# Altium PCB Dongle.PcbDoc
Units mil, origin at the board's own origin, x right, y up, seen from the top; angles counter-clockwise.
Board outline 3760.03 x 1770.03 mil, 2 copper layers (Top Layer, Bottom Layer); 34 components, 35 nets, 167 pads, 0 vias.
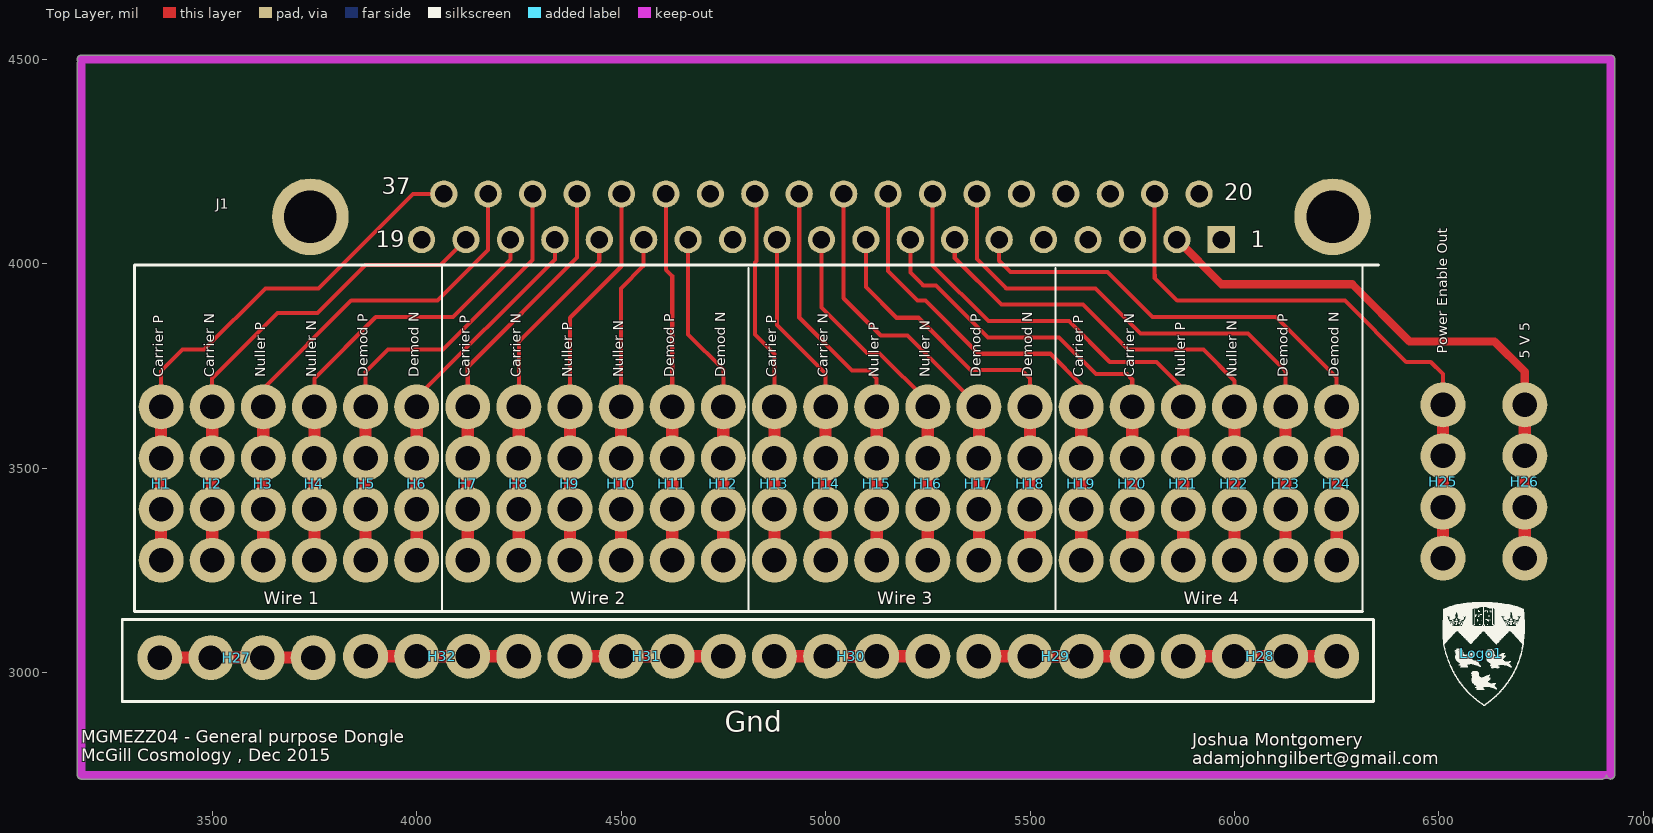
[diagram p0: Top Layer view]
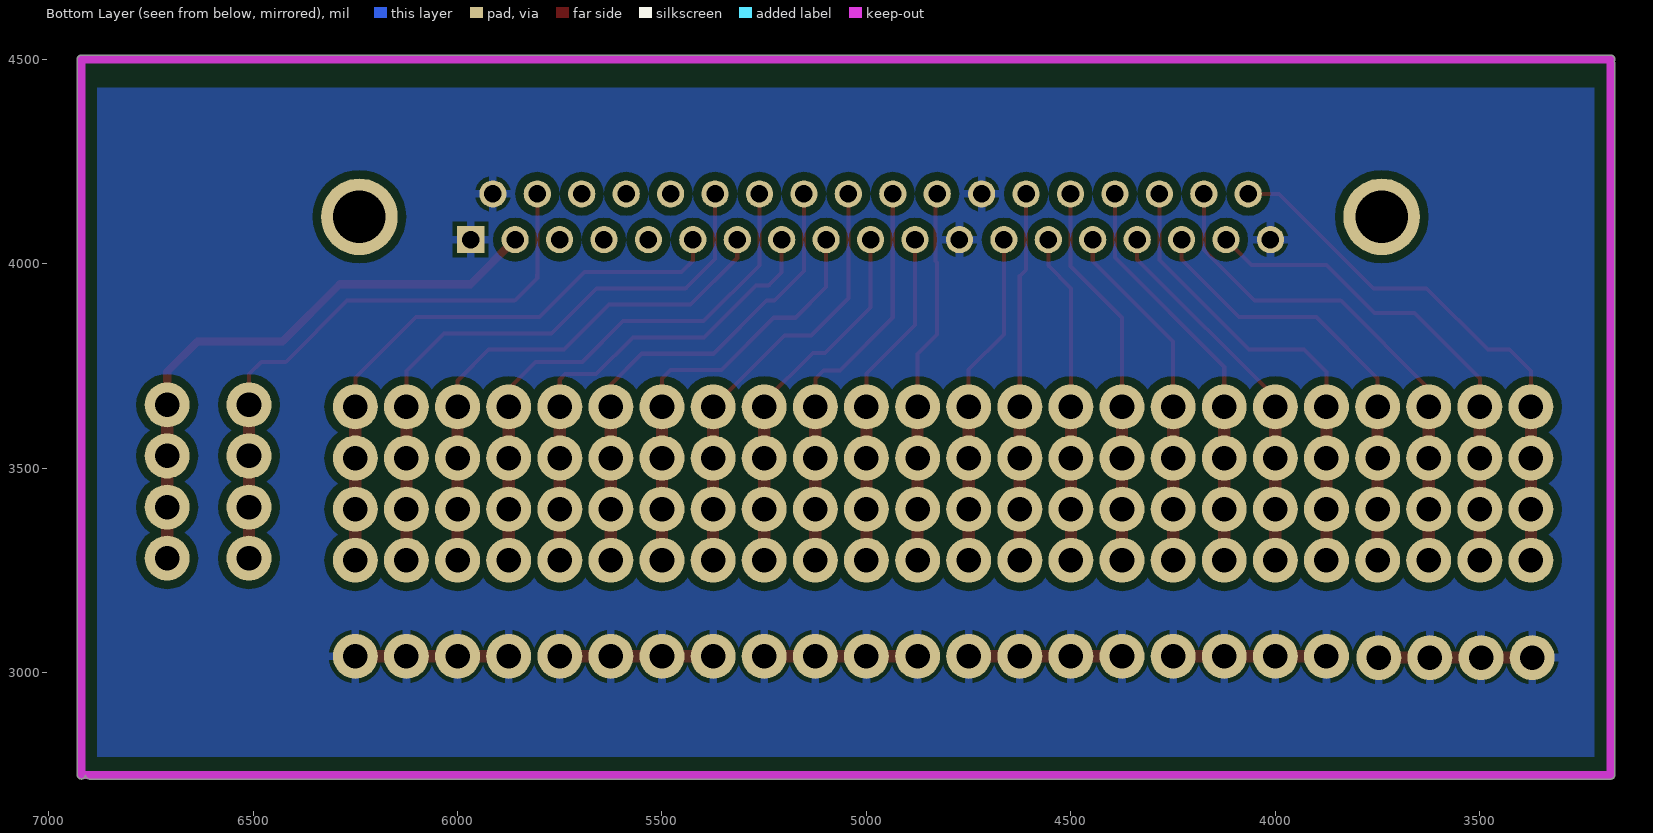
[diagram p1: Bottom Layer view, seen from below]

## Layer stack, top to bottom
Top Solder: solder mask 0.4, Solder Resist, Dk 3.5
Top Layer: signal copper 1.4
Dielectric 1: dielectric 12.6, FR-4, Dk 4.8
Bottom Layer: signal copper 1.4
Bottom Solder: solder mask 0.4, Solder Resist, Dk 3.5

## Board outline
3169.99,2750 ccw(c3180,2750) 3180,2739.99 6900,2739.99 ccw(c6900,2750) 6910,2749.45 ccw(c6920,2750) 6930.02,2750 6930.02,4500 ccw(c6920,4500) 6920,4510.02 3180,4510.02 ccw(c3180,4500) 3171.32,4495 ccw(c3180,4490) 3169.99,4490

## Design rules (kind name [scope] priority, off if disabled: settings)
Clearance Clearance_Gnd [InNet('GND')] p1: gap=20
Clearance [All] p2: gap=10
DiffPairsRouting [All] p1: maxlimit=10 minlimit=10 mostfreqgap=10 toplayer_minwidth=15 toplayer_maxwidth=15 toplayer_prefwidth=15 bottomlayer_minwidth=15 bottomlayer_maxwidth=15 bottomlayer_prefwidth=15 maxuncoupledlength=500
HoleSize [All] p1: absolutevalues=TRUE maxlimit=500 minlimit=1 maxpercent=80.000 minpercent=20.000
MinimumSolderMaskSliver [All] p1: minsoldermaskwidth=5
PolygonConnect [All] p1: connectstyle=Relief reliefconductorwidth=20 reliefentries=4 polygonreliefangle="90 Angle" airgapwidth=10
RoutingVias [All] p1: holewidth=28 width=50 viastyle="Through Hole" minholewidth=28 minwidth=50 maxholewidth=28 maxwidth=50
SilkToSilkClearance [All] p1: silktosilkclearance=5
SilkToSolderMaskClearance [IsPad] p1: minsilkscreentomaskgap=0 clearancetoexposedcopper=TRUE
SolderMaskExpansion [All] p1: expansion=4
Width [All] p1: maxlimit=100 minlimit=5 preferedwidth=10
25 further rules are at their usual default settings.

## Classes and differential pairs
differential pair SCL: +SCL_P -SCL_N
differential pair SDA_MISO: +SDA_MISO_P -SDA_MISO_N
differential pair SDA_MOSI: +SDA_MOSI_P -SDA_MOSI_N

## Components (designator, comment, footprint, x,y, rotation, side; value= is the part's Value field where it differs from the comment)
H1 "RowOfHoles" RowOfHoles#1 3375,3275 r180 top
H2 "RowOfHoles" RowOfHoles#1 3500,3275 r180 top
H3 "RowOfHoles" RowOfHoles#1 3625,3275 r180 top
H4 "RowOfHoles" RowOfHoles#1 3750,3275 r180 top
H5 "RowOfHoles" RowOfHoles#1 3875,3275 r180 top
H6 "RowOfHoles" RowOfHoles#1 4000,3275 r180 top
H7 "RowOfHoles" RowOfHoles#1 4125,3275 r180 top
H8 "RowOfHoles" RowOfHoles#1 4250,3275 r180 top
H9 "RowOfHoles" RowOfHoles#1 4375,3275 r180 top
H10 "RowOfHoles" RowOfHoles#1 4500,3275 r180 top
H11 "RowOfHoles" RowOfHoles#1 4625,3275 r180 top
H12 "RowOfHoles" RowOfHoles#1 4750,3275 r180 top
H13 "RowOfHoles" RowOfHoles#1 4875,3275 r180 top
H14 "RowOfHoles" RowOfHoles#1 5000,3275 r180 top
H15 "RowOfHoles" RowOfHoles#1 5125,3275 r180 top
H16 "RowOfHoles" RowOfHoles#1 5250,3275 r180 top
H17 "RowOfHoles" RowOfHoles#1 5375,3275 r180 top
H18 "RowOfHoles" RowOfHoles#1 5500,3275 r180 top
H19 "RowOfHoles" RowOfHoles#1 5625,3275 r180 top
H20 "RowOfHoles" RowOfHoles#1 5750,3275 r180 top
H21 "RowOfHoles" RowOfHoles#1 5875,3275 r180 top
H22 "RowOfHoles" RowOfHoles#1 6000,3275 r180 top
H23 "RowOfHoles" RowOfHoles#1 6125,3275 r180 top
H24 "RowOfHoles" RowOfHoles#1 6250,3275 r180 top
H25 "RowOfHoles" RowOfHoles#1 6510,3280 r180 top
H26 "RowOfHoles" RowOfHoles#1 6710,3280 r180 top
H27 "RowOfHoles" RowOfHoles#2 3747,3037 r270 top
H28 "RowOfHoles" RowOfHoles#2 6250,3040 r270 top
H29 "RowOfHoles" RowOfHoles#2 5750,3040 r270 top
H30 "RowOfHoles" RowOfHoles#2 5250,3040 r270 top
H31 "RowOfHoles" RowOfHoles#2 4750,3040 r270 top
H32 "RowOfHoles" RowOfHoles#2 4250,3040 r270 top
J1 "DB37M" DSUB37-M 6240,4115 r0 top
Logo1 "McGillLogo" McGillLogo1 6604,3048 r0 top

## Footprints (in the part's own frame and the unit in brackets; to place one, negate y for a bottom-side part, rotate by r counter-clockwise, add the part's x,y. Pads: shape width x height; smd on the part's side, far side on the other; paste and mask are expansions set on the pad)
DSUB37-M [mm] "DSUB 37Pin Male"
  rect 1.69x1.69 hole 1.09: 1(-6.912,-1.42)
  round 1.69 hole 1.09: 2(-9.672,-1.42) 3(-12.432,-1.42) 4(-15.192,-1.42) 5(-17.952,-1.42) 6(-20.712,-1.42) 7(-23.472,-1.42) 8(-26.232,-1.42) 9(-28.992,-1.42) 10(-31.752,-1.42) 11(-34.512,-1.42) 12(-37.272,-1.42) 13(-40.032,-1.42) 14(-42.792,-1.42) 15(-45.552,-1.42) 16(-48.312,-1.42) 17(-51.072,-1.42) 18(-53.832,-1.42) 19(-56.592,-1.42) 20(-8.291,1.42) 21(-11.051,1.42) 22(-13.811,1.42) 23(-16.571,1.42) 24(-19.331,1.42) 25(-22.091,1.42) 26(-24.851,1.42) 27(-27.611,1.42) 28(-30.371,1.42) 29(-33.131,1.42) 30(-35.891,1.42) 31(-38.651,1.42) 32(-41.411,1.42) 33(-44.171,1.42) 34(-46.931,1.42) 35(-49.691,1.42) 36(-52.451,1.42) 37(-55.211,1.42)
  round 4.76 hole 3.26: 38(0,0) 39(-63.5,0)
  silkscreen extent -66.29,-3 2.84,-3, body extent -66.21,-3.45 3.11,15.7, height 12.55
McGillLogo1 [mil] "McGillLogo"
  silkscreen extent -95,-127 106,124
RowOfHoles#1 [mil]
  round 110 hole 60: 0(0,0) 0(0,-125) 0(0,-250) 0(0,-375)
  Top Layer lines w30: 0,0 0,-125 0,-250 0,-375
RowOfHoles#2 [mil]
  round 110 hole 60: 0(0,0) 0(0,-125) 0(0,-250) 0(0,-375)
  Top Layer lines w30: 0,-375 0,0

## Part data
Logo1: library part Logo, "Silkscreen Logo"

## Nets (pads, with @x,y where several pads share a name; then routed paths per layer and width w, separated by ;. In a path a pad name is that pad's centre, name@x,y a point inside that pad or via, vN(x,y) a via of type N, cw(c..) or ccw(c..) an arc to the next point about the centre after c; other vN are vias at no path point)
CARRIER1_N: H2.0 J1.18 | length 831.1
  Top Layer w10: H2.0@3500,3650 3500,3720 3660,3880 3758,3880 3875,3997 4058.54,3997 J1.18
CARRIER1_P: H1.0 J1.37 | length 958.7
  Top Layer w10: H1.0@3375,3650 3375,3738 3427,3790 3480,3790 3630,3940 3760,3940 3990.91,4170.9 J1.37
CARRIER2_N: H8.0 J1.15 | length 490.5
  Top Layer w10: H8.0@4250,3650 4250,3810 4446.62,4006.62 J1.15
CARRIER2_P: H7.0 J1.34 | length 631.6
  Top Layer w10: H7.0@4125,3650 4125,3748 4392.32,4015.32 J1.34
CARRIER3_N: H14.0 J1.11 | length 458.3
  Top Layer w10: J1.11 4881.26,3850.74 5000,3732 H14.0@5000,3650
CARRIER3_P: H13.0 J1.30 | length 544
  Top Layer w10: J1.30 4830.87,4167.01 4830.87,4006.87 4826.97,4002.97 4826.97,3827.03 4875,3779 H13.0@4875,3650
CARRIER4_N: H20.0 J1.8 | length 798.5
  Top Layer w10: J1.8 5207.25,3978.75 5239,3947 5270,3947 5397,3820 5571,3820 5661,3730 5737,3730 5750,3717 H20.0@5750,3650
CARRIER4_P: H19.0 J1.27 | length 830.7
  Top Layer w10: J1.27 5152.95,3982.05 5225,3910 5244,3910 5374,3780 5550,3780 5625,3705 H19.0@5625,3650
DEMOD1_N: H6.0 J1.16 | length 549.1
  Top Layer w10: H6.0@4000,3650 4000,3673 4337.95,4010.95 J1.16
DEMOD1_P: H5.0 J1.35 | length 768.7
  Top Layer w10: H5.0@3875,3650 3875,3735 3930,3790 4064,3790 4283.66,4009.66 J1.35
DEMOD2_N: H12.0 J1.13 | length 444.7
  Top Layer w10: J1.13 4663.94,3827.06 4750,3741 H12.0@4750,3650
DEMOD2_P: H11.0 J1.32 | length 527.3
  Top Layer w10: J1.32 4609.65,3985.35 4625,3970 H11.0@4625,3650
DEMOD3_N: H18.0 J1.9 | length 679.1
  Top Layer w10: J1.9 5098.58,3943.42 5174,3868 5227,3868 5355,3740 5479,3740 5500,3719 H18.0@5500,3650
DEMOD3_P: H17.0 J1.28 | length 696
  Top Layer w10: J1.28 5044.29,3915.71 5135,3825 5200,3825 H17.0@5375,3650
DEMOD4_N: H24.0 J1.6 | length 1067.3
  Top Layer w10: J1.6 5424.57,4007.43 5452,3980 5690,3980 5800,3870 6102,3870 6250,3722 H24.0@6250,3650
DEMOD4_P: H23.0 J1.25 | length 1115.3
  Top Layer w10: J1.25 5370.28,4011.72 5442,3940 5660,3940 5770,3830 6033,3830 6125,3738 H23.0@6125,3650
GND: H27.0 H28.0 H29.0 H30.0 H31.0 H32.0 J1.1 J1.12 J1.19 J1.20 J1.31
NetJ1_38: J1.38
NetJ1_39: J1.39
NULLER1_N: H4.0 J1.17 | length 718.3
  Top Layer w10: H4.0@3750,3650 3750,3720 3900,3870 4089,3870 4229.29,4010.29 J1.17
NULLER1_P: H3.0 J1.36 | length 872.3
  Top Layer w10: H3.0@3625,3650 3625,3695 3840,3910 4051,3910 4175,4034 J1.36
NULLER2_N: H10.0 J1.14 | length 432
  Top Layer w10: H10.0@4500,3650 4500,3940 4555.28,3995.28 J1.14
NULLER2_P: H9.0 J1.33 | length 573.1
  Top Layer w10: H9.0@4375,3650 4375,3868 4500.99,3993.99 J1.33
NULLER3_N: H16.0 J1.10 | length 534.4
  Top Layer w10: J1.10 4989.92,3893.08 5101,3782 5131,3782 5250,3663 H16.0@5250,3650
NULLER3_P: H15.0 J1.29 | length 622.8
  Top Layer w10: J1.29 4935.63,3868.37 5065,3739 5105,3739 5125,3719 H15.0@5125,3650
NULLER4_N: H22.0 J1.7 | length 917.4
  Top Layer w10: J1.7 5315.91,4014.09 5430,3900 5630,3900 5740,3790 5924,3790 6000,3714 H22.0@6000,3650
NULLER4_P: H21.0 J1.26 | length 957.2
  Top Layer w10: J1.26 5261.62,3996.38 5398,3860 5595,3860 5695,3760 5809,3760 5875,3694 H21.0@5875,3650
P5V5FILT: H26.0 J1.2 | length 1072.6
  Top Layer w20: J1.2 5968.31,3950 6288,3950 6428,3810 6636,3810 6710,3736 H26.0@6710,3648
POWEREN: H25.0 J1.21 | length 1083.3
  Top Layer w10: J1.21 5804.92,3973.08 5805,3973 5805,3965 5860,3910 6270,3910 6420,3760 6480,3760 6510,3730 H25.0@6510,3655
SCL_N: J1.3
SCL_P: J1.22
SDA_MISO_N: J1.5
SDA_MISO_P: J1.24
SDA_MOSI_N: J1.4
SDA_MOSI_P: J1.23

## Polygon pours and split planes (outlines as drawn)
GND on Bottom Layer "BotGnd" (solid, pour order 0): 3220,2794 3220,4430 6881,4430 6881,2794

## Keep-outs
Keep-Out Layer:
  lines w20: 3180,2750 3180,4490 3180,4500 6920,4500 6920,2750 6900,2750 3180,2750

## Silkscreen, mask and mechanical layers (free items; w line width, h text height)
Top Overlay:
  lines w5: 4062,3150 4062,3996.89 ; 4812,3150 4812,3990 ; 5562,3150 5562,3990 ; 6313,3150 6313,3996.89
  lines w7: 3310,3996.89 3310,3150 3320,3150 4050,3150 4060,3150 ; 3313.11,3996.89 4060,3996.89 ; 4062,3150 4812,3150 5562,3150 6313,3150 ; 3280,2930 3280,3130 6340,3130 6340,2930 3280,2930
  text "Power Enable Out" at 6520,3780 h25 r90
  text "5 V 5" at 6722,3768 h25 r90
  text "Carrier P" at 3380,3722 h25 r90
  text "Carrier N" at 3505,3722 h25 r90
  text "Nuller P" at 3630,3722 h25 r90
  text "Nuller N" at 3755,3722 h25 r90
  text "Demod P" at 3880,3722 h25 r90
  text "Demod N" at 4005,3722 h25 r90
  text "Carrier P" at 4130,3722 h25 r90
  text "Carrier N" at 4255,3722 h25 r90
  text "Nuller P" at 4380,3722 h25 r90
  text "Nuller N" at 4505,3722 h25 r90
  text "Demod P" at 4630,3722 h25 r90
  text "Demod N" at 4755,3722 h25 r90
  text "Carrier P" at 4880,3722 h25 r90
  text "Carrier N" at 5005,3722 h25 r90
  text "Nuller P" at 5130,3722 h25 r90
  text "Nuller N" at 5255,3722 h25 r90
  text "Demod P" at 5380,3722 h25 r90
  text "Demod N" at 5505,3722 h25 r90
  text "Carrier P" at 5630,3722 h25 r90
  text "Carrier N" at 5755,3722 h25 r90
  text "Nuller P" at 5880,3722 h25 r90
  text "Nuller N" at 6005,3722 h25 r90
  text "Demod P" at 6130,3722 h25 r90
  text "Demod N" at 6255,3722 h25 r90
  text "Wire 1" at 3626,3168 h30
  text "Wire 2" at 4376,3168 h30
  text "Wire 3" at 5126,3168 h30
  text "Wire 4" at 5876,3168 h30
  text "Gnd" at 4753,2855 h50
  text "MGMEZZ04 - General purpose Dongle / McGill Cosmology , Dec 2015" at 3180,2784 h30
  text "Joshua Montgomery / adamjohngilbert@gmail.com" at 5897,2776 h30
Bottom Solder:
  text "37" at 4085,4235 h25
  text "20" at 5925,4230 h25
  text "19" at 4030,3980 h25
  text "1" at 5995,3980 h25

## Text inside footprints (layer, text, board x,y; h text height)
J1: Top Overlay "20" at 5975,4155 h40; Top Overlay "19" at 3900,4040 h40; Top Overlay "1" at 6040,4040 h40; Top Overlay "37" at 3915,4170 h40